# Altium PCB PCB1.PcbDoc
Units mil, origin at the board's own origin, x right, y up, seen from the top; angles counter-clockwise.
Board outline 2761.5 x 1813.75 mil, 2 copper layers (Top Layer, Bottom Layer); 52 components, 42 nets, 166 pads, 32 vias.
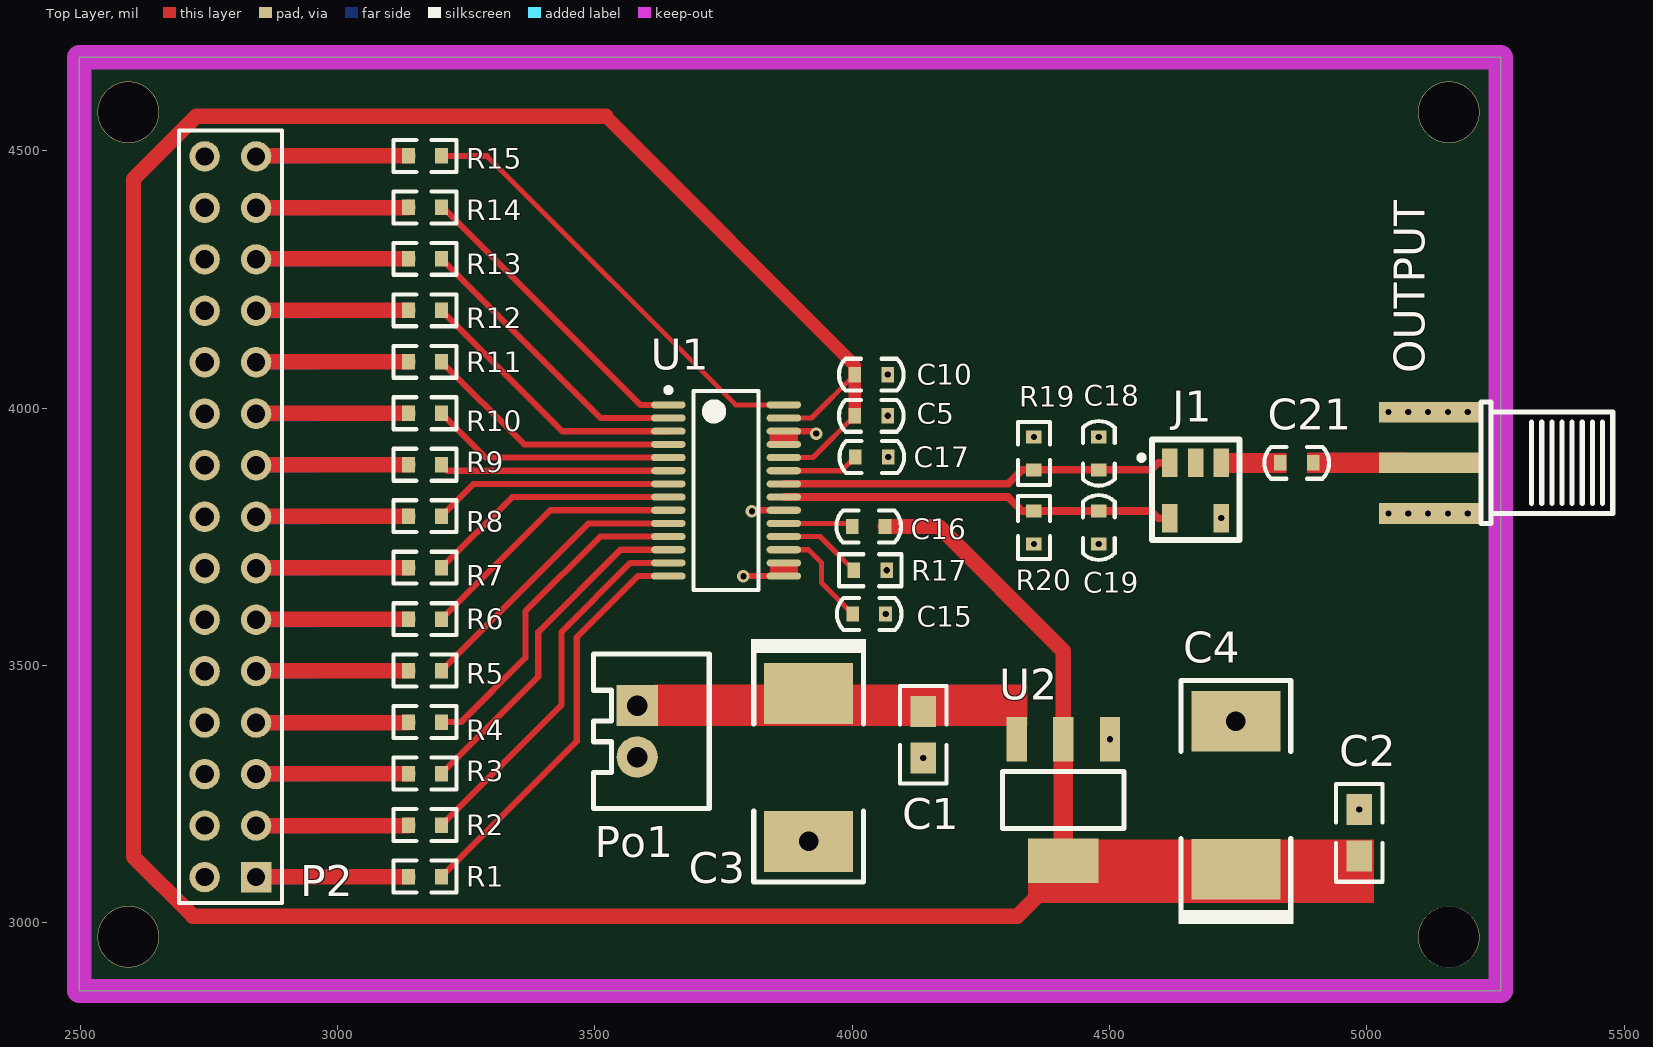
[diagram p0: Top Layer view]
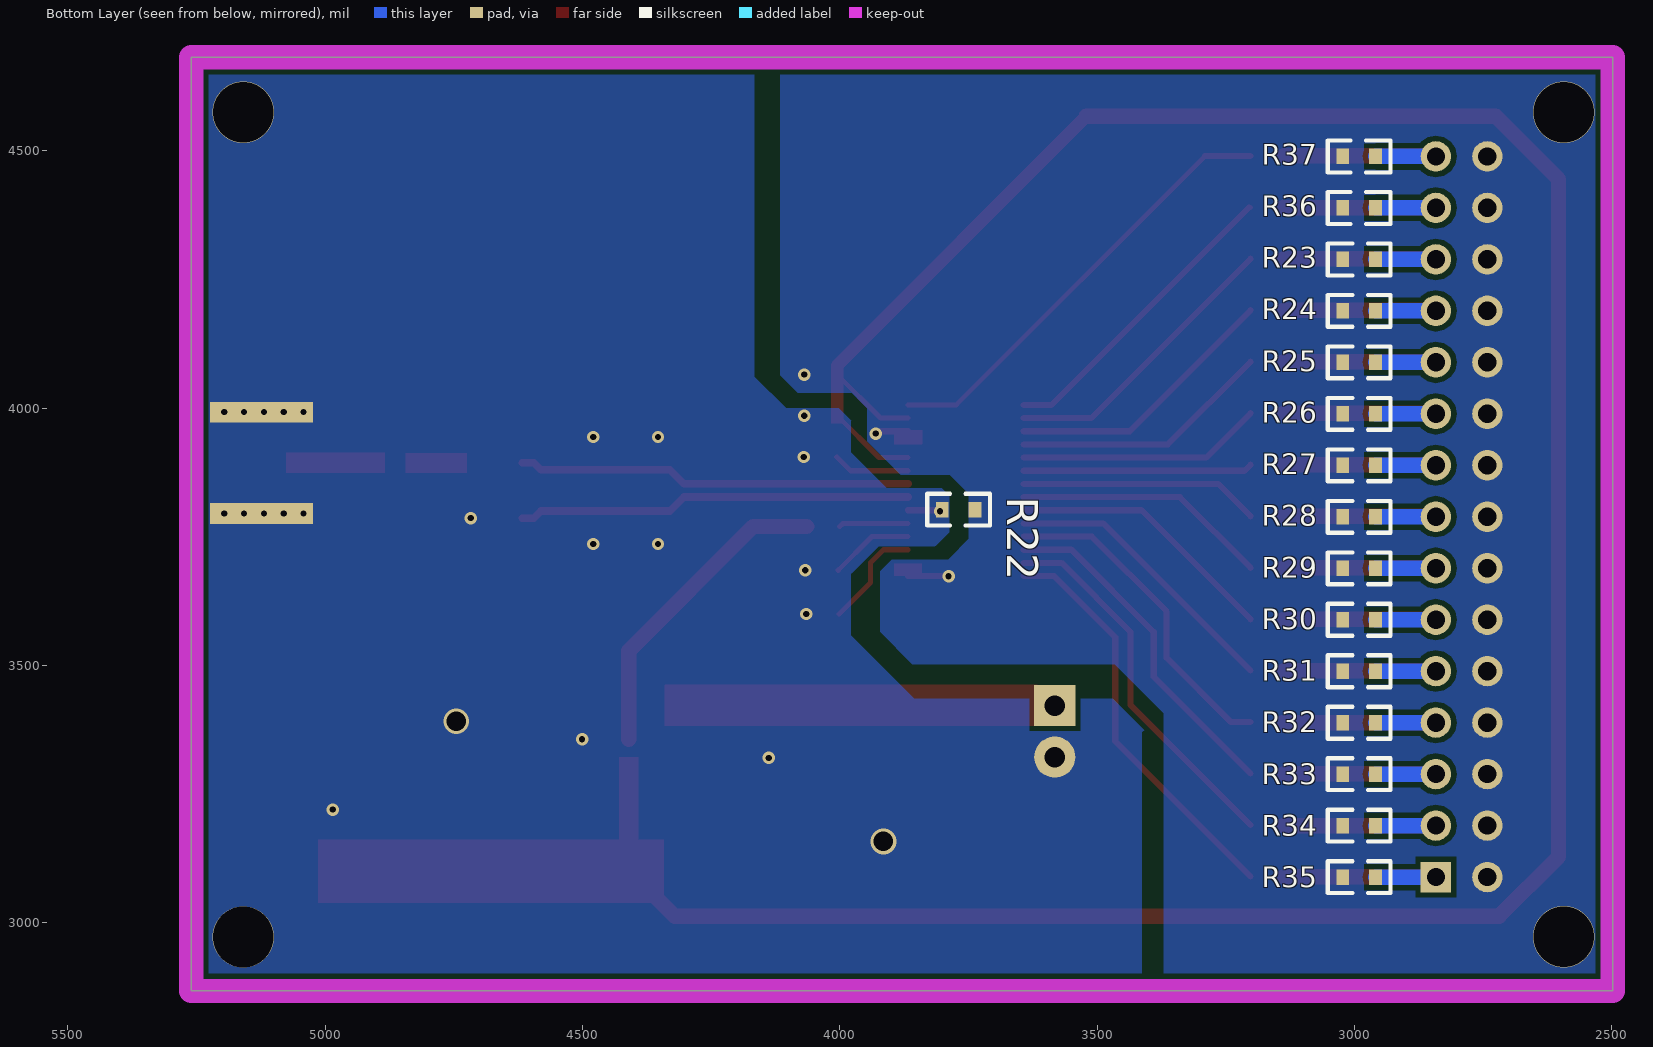
[diagram p1: Bottom Layer view, seen from below]

## Layer stack, top to bottom
Top Solder: solder mask 0.4, Solder Resist, Dk 3.5
Top Layer: signal copper 1.4
Dielectric 1: dielectric 12.6, FR-4, Dk 4.8
Bottom Layer: signal copper 1.4
Bottom Solder: solder mask 0.4, Solder Resist, Dk 3.5

## Board outline
2498.5,2867.75 2498.5,4681.5 5260,4681.5 5260,2867.75

## Design rules (kind name [scope] priority, off if disabled: settings)
Clearance [All] p1: gap=10
DiffPairsRouting [All] p1: maxlimit=10 minlimit=10 mostfreqgap=10 toplayer_minwidth=15 toplayer_maxwidth=15 toplayer_prefwidth=15 bottomlayer_minwidth=15 bottomlayer_maxwidth=15 bottomlayer_prefwidth=15 maxuncoupledlength=500
PlaneConnect [All] p1: planeconnectstyle=Direct reliefexpansion=20 reliefentries=4 reliefconductorwidth=10 reliefairgap=10
PolygonConnect [All] p1: connectstyle=Direct reliefconductorwidth=10 reliefentries=4 polygonreliefangle="90 Angle" airgapwidth=10
RoutingVias [All] p1: holewidth=28 width=50 viastyle="Through Hole" minholewidth=28 minwidth=50 maxholewidth=28 maxwidth=50
SolderMaskExpansion [All] p1: expansion=4
Width [All] p1: maxlimit=100 minlimit=6 preferedwidth=10
28 further rules are at their usual default settings.

## Classes and differential pairs
differential pair IOUT: +IOUT_P -IOUT_N

## Components (designator, comment, footprint, x,y, rotation, side; value= is the part's Value field where it differs from the comment)
C1 "0.1uf" 0805 4138,3320.5 r90 top
C2 "0.1uf" 0805 4985,3220 r270 top
C3 "Cap" 7343C-TYPE_D 3915.25,3445.65 r90 top
C4 "Cap" 7343C-TYPE_D 4745.25,3104.35 r270 top
C5 "0.1uf" 0603C 4069,3985 r180 top
C10 "0.1uf" 0603C 4069,4065 r180 top
C15 "0.1uf" 0603C 4065,3600 r180 top
C16 "0.1uf" 0603C 4000,3770 r0 top
C17 "0.1uf" 0603C 4006,3905 r0 top
C18 "30p" 0603C 4479,3944 r270 top
C19 "30p" 0603C 4479,3736 r90 top
C21 "30p" 0603C 4831.5,3893.75 r0 top
J1 "ETC1-1-13TR" SM-22 4602,3758.75 r0 top
OUTPUT "差分输出" SMA-LYING 5182.06,3897.69 r180 top (schematic designator Vo_S1)
P2 "Header 15X2" HDR2X15 2842,3089 r90 top
Po1 "Power_2Port" Power_S_2Port 3582.25,3422 r270 top
R1 "30R" 0603R 3170,3090 r0 top
R2 "30R" 0603R 3170,3190 r0 top
R3 "30R" 0603R 3170,3290 r0 top
R4 "30R" 0603R 3170,3390 r0 top
R5 "30R" 0603R 3170,3490 r0 top
R6 "30R" 0603R 3170,3590 r0 top
R7 "30R" 0603R 3170,3690 r0 top
R8 "30R" 0603R 3170,3790 r0 top
R9 "30R" 0603R 3170,3890 r0 top
R10 "30R" 0603R 3170,3990 r0 top
R11 "30R" 0603R 3170,4090 r0 top
R12 "30R" 0603R 3170,4190 r0 top
R13 "30R" 0603R 3170,4290 r0 top
R14 "30R" 0603R 3170,4390 r0 top
R15 "30R" 0603R 3170,4490 r0 top
R17 "50R" 0603R 4035,3685 r180 top
R19 "50R" 0603R 4353,3912 r270 top
R20 "50R" 0603R 4353,3768 r90 top
R22 "0" 0603R 3769,3802.75 r180 bottom
R23 "50R" 0603R 2991,4288.96 r0 bottom
R24 "50R" 0603R 2991,4188.95 r0 bottom
R25 "50R" 0603R 2991,4088.93 r0 bottom
R26 "50R" 0603R 2991,3988.91 r0 bottom
R27 "50R" 0603R 2991,3888.89 r0 bottom
R28 "50R" 0603R 2991,3788.87 r0 bottom
R29 "50R" 0603R 2991,3688.86 r0 bottom
R30 "50R" 0603R 2991,3588.84 r0 bottom
R31 "50R" 0603R 2991,3488.82 r0 bottom
R32 "50R" 0603R 2991,3388.8 r0 bottom
R33 "50R" 0603R 2991,3288.79 r0 bottom
R34 "50R" 0603R 2991,3188.77 r0 bottom
R35 "50R" 0603R 2991,3088.75 r0 bottom
R36 "50R" 0603R 2991,4388.98 r180 bottom
R37 "50R" 0603R 2991,4489 r180 bottom
U1 "DAC904E" TI-PW28_N 3755,3840 r0 top
U2 "AMS1117-3.3V" SOT-223 4410,3238.75 r90 top

## Footprints (in the part's own frame and the unit in brackets; to place one, negate y for a bottom-side part, rotate by r counter-clockwise, add the part's x,y. Pads: shape width x height; smd on the part's side, far side on the other; paste and mask are expansions set on the pad)
0603C [mil]
  rect 25x30 smd: 1(0,0) 2(64,0)
  silkscreen extent -31,-31 95,31
0603R [mil]
  rect 25x30 smd: 1(-32,0) 2(32,0)
  silkscreen extent -61,-31 61,31
0805 [mil]
  rect 60x50 smd: 1(0,0) 2(90,0)
  silkscreen extent -50,-45 140,45
7343C-TYPE_D [mm]
  rect 3x4.4 smd: 1(0,0) 2(-7.3,0)
  silkscreen extent -9.31,-2.84 2.7,2.84
HDR2X15 [mm] "Connector; Header; 15x2 Position"
  rect 1.5x1.5 hole 0.9: 1(0,0)
  round 1.5 hole 0.9: 2(0,2.54) 3(2.54,0) 4(2.54,2.54) 5(5.08,0) 6(5.08,2.54) 7(7.62,0) 8(7.62,2.54) 9(10.16,0) 10(10.16,2.54) 11(12.7,0) 12(12.7,2.54) 13(15.24,0) 14(15.24,2.54) 15(17.78,0) 16(17.78,2.54) 17(20.32,0) 18(20.32,2.54) 19(22.86,0) 20(22.86,2.54) 21(25.4,0) 22(25.4,2.54) 23(27.94,0) 24(27.94,2.54) 25(30.48,0) 26(30.48,2.54) 27(33.02,0) 28(33.02,2.54) 29(35.56,0) 30(35.56,2.54)
  silkscreen extent -1.27,-1.27 36.83,3.81
Power_S_2Port [mil]
  rect 80x80 hole 40: 1(0,0)
  round 80 hole 40: 2(100,0)
  silkscreen extent -100,-85 200,140
SM-22 [mil]
  rect 30x55 smd: 1(15,135) 2(65,135) 3(115,135) 4(115,27.5) 5(15,27.5)
  silkscreen extent -45,-15 150,180
SMA-LYING [mm]
  rect 5.08x1.016 smd: 0(1.5,0.1) 1(1.5,2.6) 1(1.5,-2.4)
  rect 5.08x1.016 smd far side: 1(1.5,2.6) 1(1.5,-2.4)
  silkscreen extent -7.5,-2.9 -1,3.1
SOT-223 [mm]
  rect 2.2x1 smd: 1(3,-2.3) 2(3,0) 3(3,2.3)
  rect 2.2x3.5 smd: 2(-3,0)
  silkscreen extent -1.4,-3 1.4,3, body extent -3.49,-3.24 3.49,3.24, height 1.64
TI-PW28_N [mm] "SOP, 28-Leads, Body 9.7x4.4mm, Pitch 0.65mm, IPC Medium Density"
  oval 1.7x0.35 smd: 1(-2.85,4.225) 2(-2.85,3.575) 3(-2.85,2.925) 4(-2.85,2.275) 5(-2.85,1.625) 6(-2.85,0.975) 7(-2.85,0.325) 8(-2.85,-0.325) 9(-2.85,-0.975) 10(-2.85,-1.625) 11(-2.85,-2.275) 12(-2.85,-2.925) 13(-2.85,-3.575) 14(-2.85,-4.225) 15(2.85,-4.225) 16(2.85,-3.575) 17(2.85,-2.925) 18(2.85,-2.275) 19(2.85,-1.625) 20(2.85,-0.975) 21(2.85,-0.325) 22(2.85,0.325) 23(2.85,0.975) 24(2.85,1.625) 25(2.85,2.275) 26(2.85,2.925) 27(2.85,3.575) 28(2.85,4.225)
  silkscreen extent -2.97,-4.9 1.6,5.07, body extent -2.25,-4.9 2.25,4.9, height 1.2

## Part data
C1 C2 C5 C10 C15 C16 C17 C18 C19 C21: library part Cap
C3 C4: library part "Tantalium Cap"
OUTPUT: library part SMA
P2: "Header, 15-Pin, Dual row"
R1 R2 R3 R4 R5 R6 R7 R8 R9 R10 R11 R12 R13 R14 R15 R17 R19 R20 R22 R23 R24 R25 R26 R27 R28 R29 R30 R31 R32 R33 R34 R35 R36 R37: library part Res
U1: "14-Bit, 165 MSPS SpeedPlus(TM) DAC Scalable Current Outputs between 2 to 20 mA, -40 to 85 degC, 28-pin SOP (PW28), Green (RoHS & no Sb/Br)"

## Via types
v1: diameter 24, hole 12, Top Layer to Bottom Layer, 26 vias
v2: diameter 118.9, hole 118.11, Top Layer to Bottom Layer, 4 vias
v3: diameter 50, hole 38, Top Layer to Bottom Layer, 2 vias

## Nets (pads, with @x,y where several pads share a name; then routed paths per layer and width w, separated by ;. In a path a pad name is that pad's centre, name@x,y a point inside that pad or via, vN(x,y) a via of type N, cw(c..) or ccw(c..) an arc to the next point about the centre after c; other vN are vias at no path point)
3.3V: C2.2 C4.1 C5.2 C10.2 C16.2 U1.24 U1.27 U2.2 | length 5857.9
  Top Layer w10: U1.24 3923.98,3903.98 C5.2 ; U1.27 3920.75,3980.75 C10.2
  Top Layer w25: 3521,4566.75 4005,4082.75 C10.2
  Top Layer w30: 3521,4566.75 2725.5,4566.75 2603.75,4445 2603.75,3128.25 2719,3013 4321,3013 4410,3102 U2.2@4410,3120.64 ; C16.2 4168.5,3770 4410,3528.5 U2.2@4410,3356.86
AGND: C1.1 C2.1 C3.2 C4.2 C5.1 C15.1 C17.2 C18.1 C19.1 J1.4 OUTPUT.1 Po1.2 R17.1 R19.1 R20.1 R22.1 U1.20 U2.1 | length 63
  Top Layer w12: v1(3805,3799.75) 3806.86,3801.61 U1.20
  other v1: 4985,3220 4138,3320.5 4500.55,3356.86 4065,3600 4067,3685 4353,3736 4479,3736 4717,3786.25 5041.5,3795.32 5080.06,3795.32 5118.62,3795.32 5157.19,3795.32 5195.75,3795.32 4070,3905 4353,3944 4479,3944 4069,3985 5041.5,3992.18 5080.06,3992.18 5118.62,3992.18 5157.19,3992.18 5195.75,3992.18
  other v2: 5159,2972.5 5159,4574.75
  other v3: 3915.25,3158.25 4745.25,3391.75
CLK: P2.29 R15.1 R37.2 | length 413.4
  Top Layer w30: P2.29 2843,4490 R15.1
  Bottom Layer w30: P2.29 R37.2
D0: P2.1 R1.1 R35.1 | length 413.5
  Top Layer w30: P2.1 2843,3090 R1.1
  Bottom Layer w30: P2.1 2842.25,3088.75 R35.1
D1: P2.3 R2.1 R34.1 | length 413.5
  Top Layer w30: P2.3 3137,3189 R2.1
  Bottom Layer w30: P2.3 2842.23,3188.77 R34.1
D2: P2.5 R3.1 R33.1 | length 413.5
  Top Layer w30: P2.5 2843,3290 R3.1
  Bottom Layer w30: P2.5 2842.21,3288.79 R33.1
D3: P2.7 R4.1 R32.1 | length 413.5
  Top Layer w30: P2.7 3137,3389 R4.1
  Bottom Layer w30: P2.7 2842.2,3388.8 R32.1
D4: P2.9 R5.1 R31.1 | length 413.5
  Top Layer w30: P2.9 2843,3490 R5.1
  Bottom Layer w30: P2.9 2842.18,3488.82 R31.1
D5: P2.11 R6.1 R30.1 | length 413.5
  Top Layer w30: P2.11 2843,3590 R6.1
  Bottom Layer w30: P2.11 2842.16,3588.84 R30.1
D6: P2.13 R7.1 R29.1 | length 413.5
  Top Layer w30: P2.13 2843,3690 R7.1
  Bottom Layer w30: P2.13 2842.14,3688.86 R29.1
D7: P2.15 R8.1 R28.1 | length 413.5
  Top Layer w30: P2.15 2843,3790 R8.1
  Bottom Layer w30: P2.15 2842.13,3788.87 R28.1
D8: P2.17 R9.1 R27.1 | length 413.5
  Top Layer w30: P2.17 2843,3890 R9.1
  Bottom Layer w30: P2.17 2842.11,3888.89 R27.1
D9: P2.19 R10.1 R26.1 | length 413.5
  Top Layer w30: P2.19 2843,3990 R10.1
  Bottom Layer w30: P2.19 2842.09,3988.91 R26.1
D10: P2.21 R11.1 R25.1 | length 413.4
  Top Layer w30: P2.21 2843,4090 R11.1
  Bottom Layer w30: P2.21 2842.07,4088.93 R25.1
D11: P2.23 R12.1 R24.1 | length 413.4
  Top Layer w30: P2.23 2843,4190 R12.1
  Bottom Layer w30: P2.23 2842.05,4188.95 R24.1
D12: P2.25 R13.1 R23.1 | length 413.4
  Top Layer w30: P2.25 2843,4290 R13.1
  Bottom Layer w30: P2.25 P2.25 R23.1
D13: P2.27 R14.1 R36.2 | length 413.4
  Top Layer w30: P2.27 3137,4389 R14.1
  Bottom Layer w30: P2.27 R36.2
DGND: C10.1 P2.2 P2.4 P2.6 P2.8 P2.10 P2.12 P2.14 P2.16 P2.18 P2.20 P2.22 P2.24 P2.26 P2.28 P2.30 R22.2 R23.2 R24.2 R25.2 R26.2 R27.2 R28.2 R29.2 R30.2 R31.2 R32.2 R33.2 R34.2 R35.2 R36.1 R37.1 U1.15 U1.16 U1.25 U1.26 | length 143.6
  Top Layer w12: v1(3788.5,3673.25) 3788.91,3673.66 U1.15 ; U1.26 3925.34,3955.16 v1(3930,3950.5)
  other v1: 4069,4065
  other v2: 2593.75,2973 2593.75,4574.75
IOUT_N: C19.2 J1.5 R20.2 U1.21 | length 766.8
  Top Layer w15: U1.21 4303.3,3827.2 4330.5,3800 R20.2 C19.2 4580.75,3800 4594.5,3786.25 J1.5
IOUT_P: C18.2 J1.1 R19.2 U1.22 | length 766.8
  Top Layer w15: U1.22 4303.3,3852.8 4330.5,3880 R19.2 C18.2 4580.75,3880 4594.5,3893.75 J1.1
NetC1_2: C1.2 C3.1 Po1.1 U2.3
NetC15_2: C15.2 U1.17 | length 208.4
  Top Layer w10: U1.17 3915.16,3724.84 3940,3700 3940,3661 C15.2
NetC16_1: C16.1 U1.19 | length 135.3
  Top Layer w10: U1.19 3993.98,3776.02 C16.1
NetC17_1: C17.1 U1.23 | length 149.8
  Top Layer w10: U1.23 3979.39,3878.39 C17.1
NetC21_1: C21.1 J1.3
NetC21_2: C21.2 OUTPUT.0
NetR1_2: R1.2 U1.14 | length 800.9
  Top Layer w12: R1.2 3465,3353 3465,3555 3583.66,3673.66 U1.14
NetR2_2: R2.2 U1.13 | length 734.9
  Top Layer w12: R2.2 3435,3423 3435,3565 3569.25,3699.25 U1.13
NetR3_2: R3.2 U1.12 | length 671.9
  Top Layer w12: R3.2 3390,3478 3390,3565 3549.84,3724.84 U1.12
NetR4_2: R4.2 U1.11 | length 642.8
  Top Layer w12: R4.2 3240,3390 3365,3515 3365,3605 3510.43,3750.43 U1.11
NetR5_2: R5.2 U1.10 | length 559.3
  Top Layer w12: R5.2 3488.02,3776.02 U1.10
NetR6_2: R6.2 U1.9 | length 528.4
  Top Layer w12: R6.2 3413.61,3801.61 U1.9
NetR7_2: R7.2 U1.8 | length 497.6
  Top Layer w12: R7.2 3339.2,3827.2 U1.8
NetR8_2: R8.2 U1.7 | length 466.8
  Top Layer w12: R8.2 3264.8,3852.8 U1.7
NetR9_2: R9.2 U1.6 | length 445.6
  Top Layer w12: R9.2 3213.61,3878.39 U1.6
NetR10_2: R10.2 U1.5 | length 476.4
  Top Layer w12: R10.2 3288.02,3903.98 U1.5
NetR11_2: R11.2 U1.4 | length 507.2
  Top Layer w12: R11.2 3362.43,3929.57 U1.4
NetR12_2: R12.2 U1.3 | length 538.1
  Top Layer w12: R12.2 3436.84,3955.16 U1.3
NetR13_2: R13.2 U1.2 | length 568.9
  Top Layer w12: R13.2 3511.25,3980.75 U1.2
NetR14_2: R14.2 U1.1 | length 599.7
  Top Layer w10: R14.2 R14.2@3205,4390
  Top Layer w12: R14.2@3205,4390 3588.66,4006.34 U1.1
NetR15_2: R15.2 U1.28 | length 865.5
  Top Layer w10: 3290,4490 3773.66,4006.34 U1.28
  Top Layer w12: R15.2 3290,4490
NetR17_2: R17.2 U1.18 | length 162.9
  Top Layer w10: U1.18 3937.57,3750.43 R17.2
pads on no net: J1.2

## Polygon pours and split planes (outlines as drawn)
DGND on Bottom Layer "Top Layer-No Net" (solid, pour order 4): 2498.5,4681.5 4115.5,4681.5 4115.5,4063.75 4086.75,4035 4081.75,4030 3981.75,4030 3976.75,4030 3947.5,4000.75 3946.5,3999.75 3946.5,3938.5 3946.5,3935.75 3881.5,3870.75 3794,3870.75 3786.75,3870.75 3749.75,3833.75 3749.75,3753.5 3749.75,3745.75 3787.75,3707.75 3790,3705.5 3899.25,3705.5 3921.5,3683 3921.5,3565.25 3859,3502.75 3526.25,3502.75 3466.25,3502.75 3382.5,3419 3370.5,3407 3370.5,2867.75 2498.5,2867.75
AGND on Bottom Layer "Top Layer-No Net" (solid, pour order 6): 5260,4681.5 4165.75,4681.5 4165.75,4061.25 4104.25,3999.75 4103.75,3999.25 4057.75,3999.25 4002,3999.25 3977.75,3975 3978.25,3974.5 3978.25,3916.5 3978.25,3914.5 3910.25,3846.5 3907.75,3844 3807.25,3844 3802,3844 3788,3830 3787.5,3829.5 3787.5,3759.75 3787.5,3759 3814,3732.5 3815.25,3731.25 3888.5,3731.25 3924.75,3731.25 3977,3679 3978.25,3677.75 3978.25,3560.25 3978.25,3558.5 3878.75,3459 3855,3435.25 3476.75,3435.25 3469.75,3435.25 3409,3374.5 3413.25,3370.25 3413.25,2866.75 5259,2866.75 5260,2867.75

## Keep-outs
Keep-Out Layer:
  the board outline again, w47.24

## Other copper
Top Layer:
  rectangle net NetC1_2: 3616.25,3382.25 4340.5,3463
  rectangle net 3.3V: 4341.5,3038.75 5013.25,3162.25
  rectangle net 3.3V: 4390.75,3145.5 4429,3322.5
  rectangle net NetC21_2: 4883,3873.75 5076,3913.5
  rectangle net NetC21_1: 4724,3874 4844,3913.25
  rectangle net 3.3V: 3992.5,3970 4017.5,4075
  rectangle net DGND: 3839.75,3929.75 3894.25,3957.25
  rectangle net DGND: 3840,3673.75 3894.25,3698.5